# Altium PCB PCB1.PcbDoc (part 1 of 3)
Units mm, origin at the board's own origin, x right, y up, seen from the top; angles counter-clockwise.
Board outline 127.59 x 140.12 mm, 2 copper layers (Top Layer, Bottom Layer), stack 1.57 mm thick; 24 components, 13 nets, 167 pads, 3663 vias.
Unrouted connection lines stored in the file: 2.
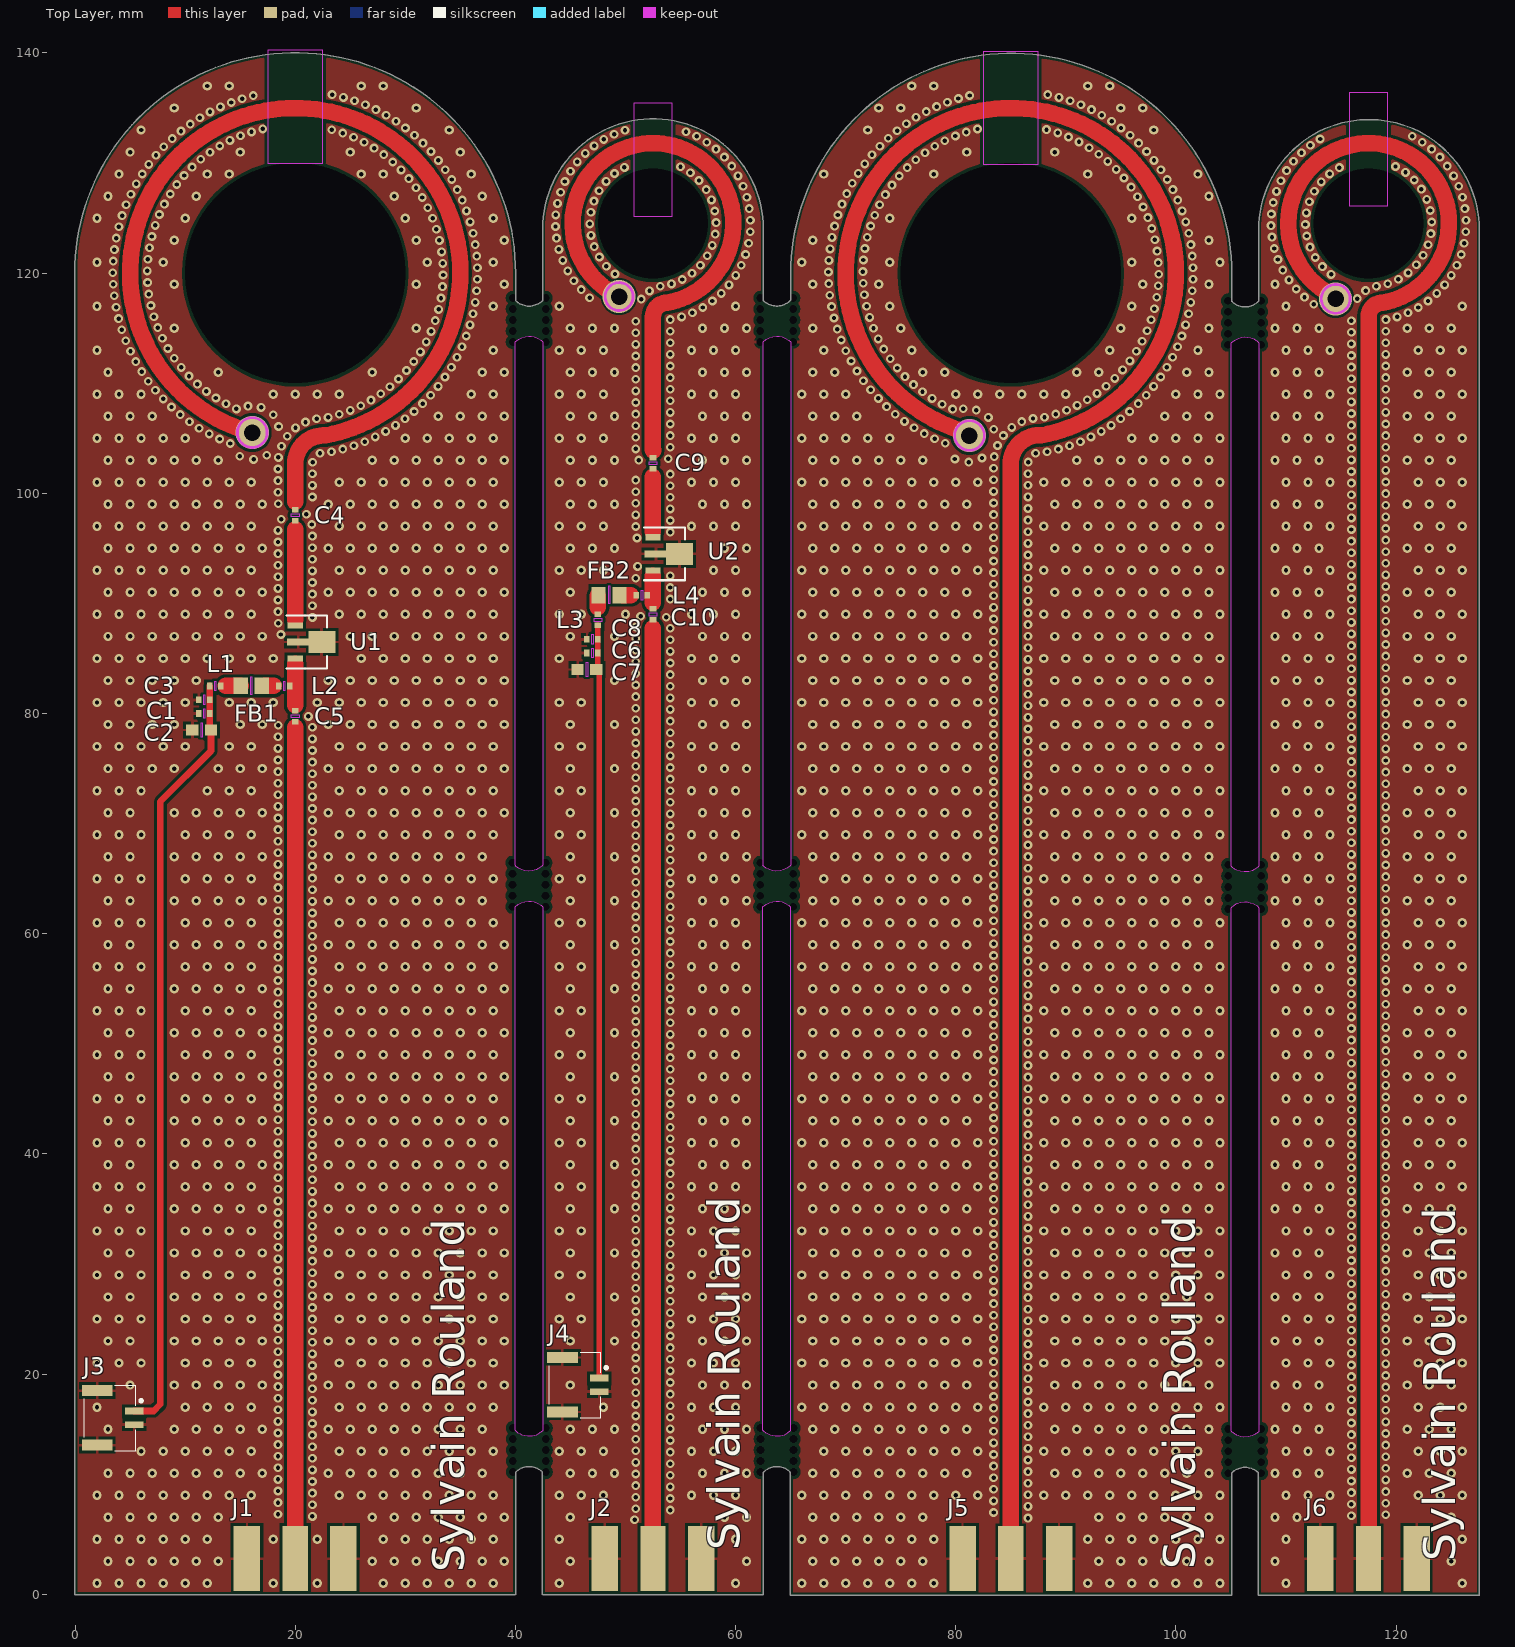
[diagram p0: Top Layer view]
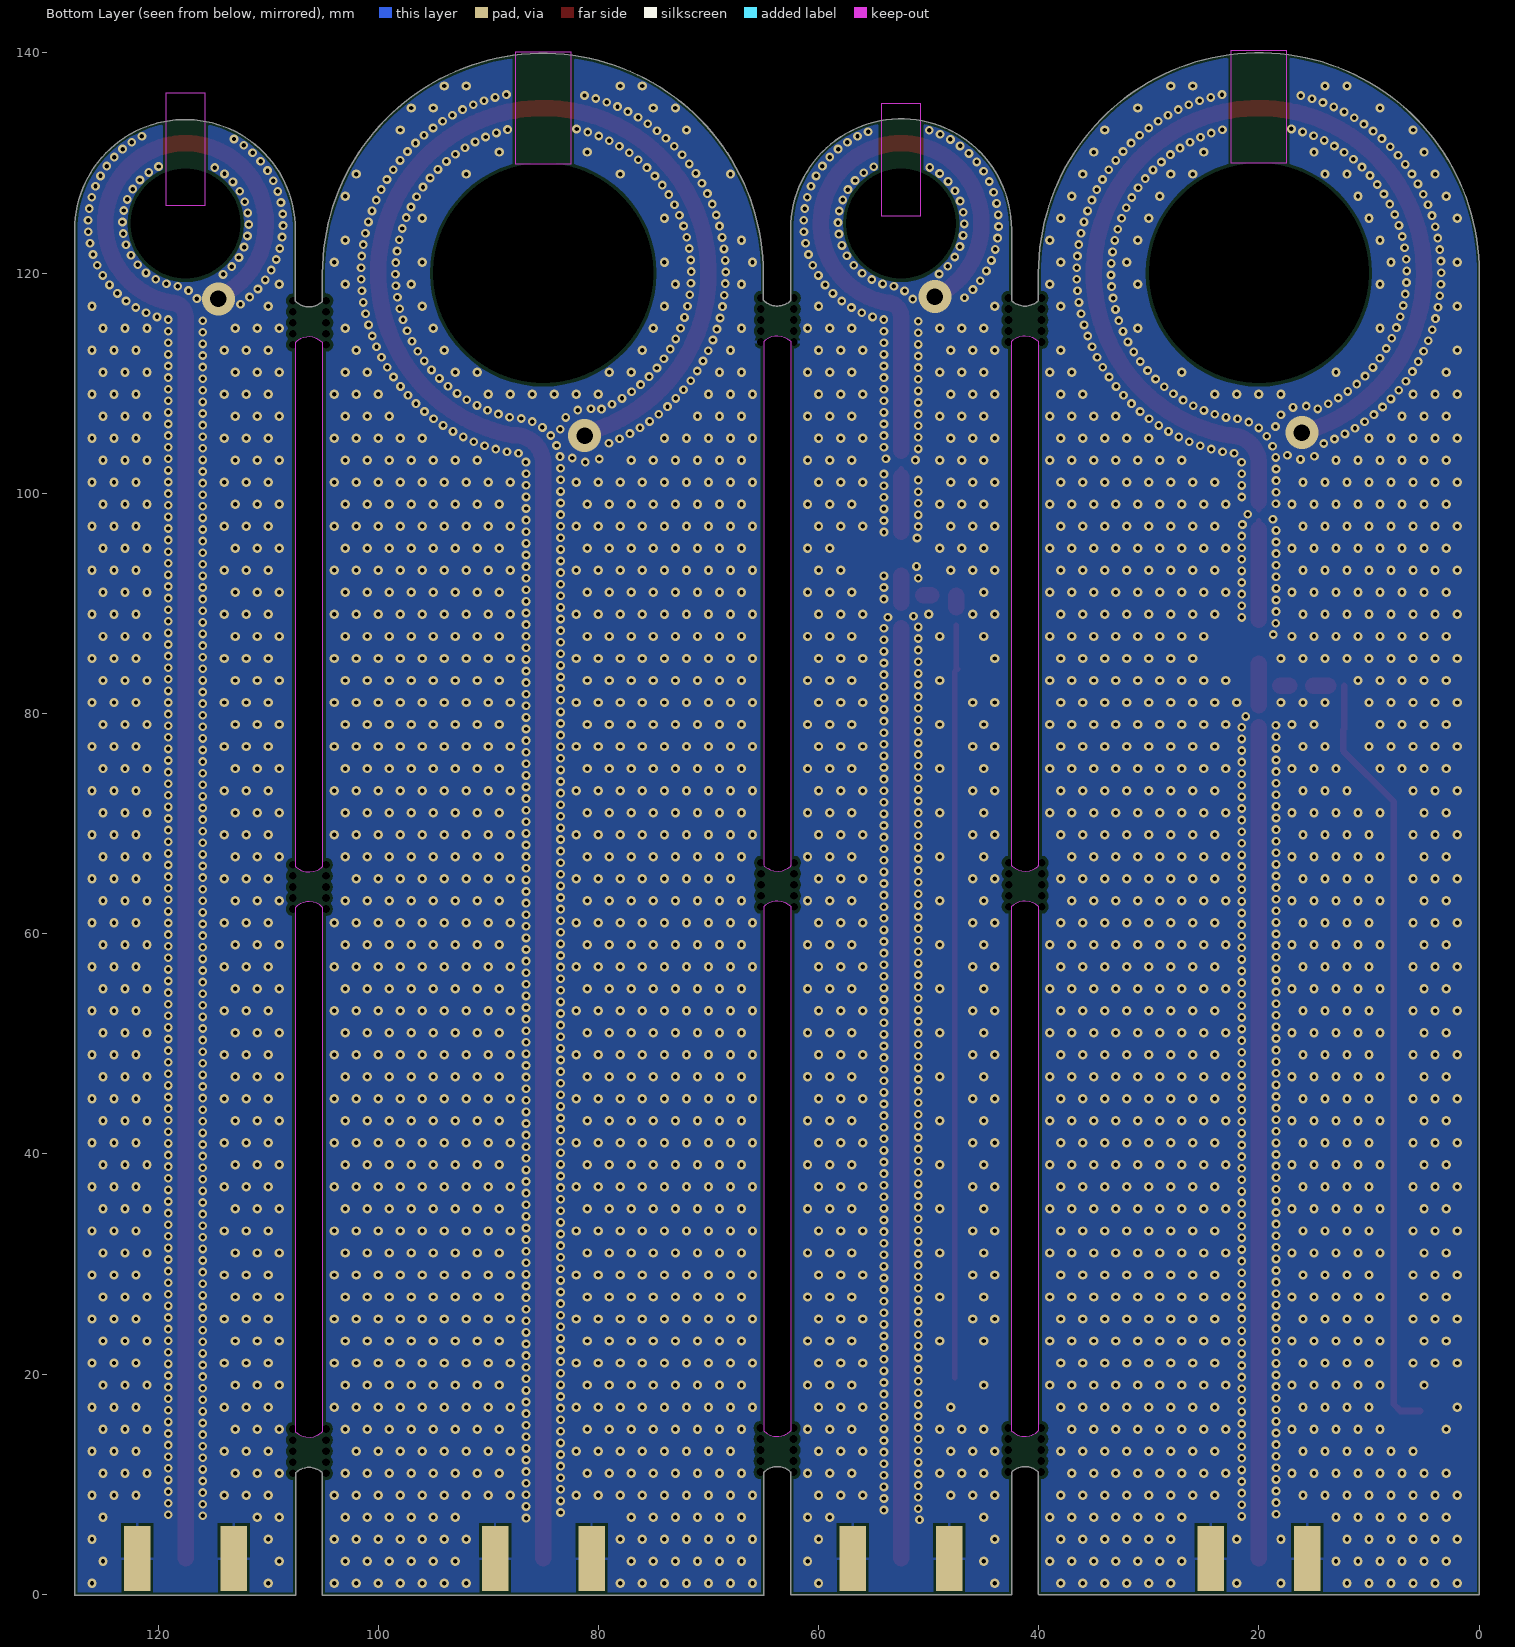
[diagram p1: Bottom Layer view, seen from below]
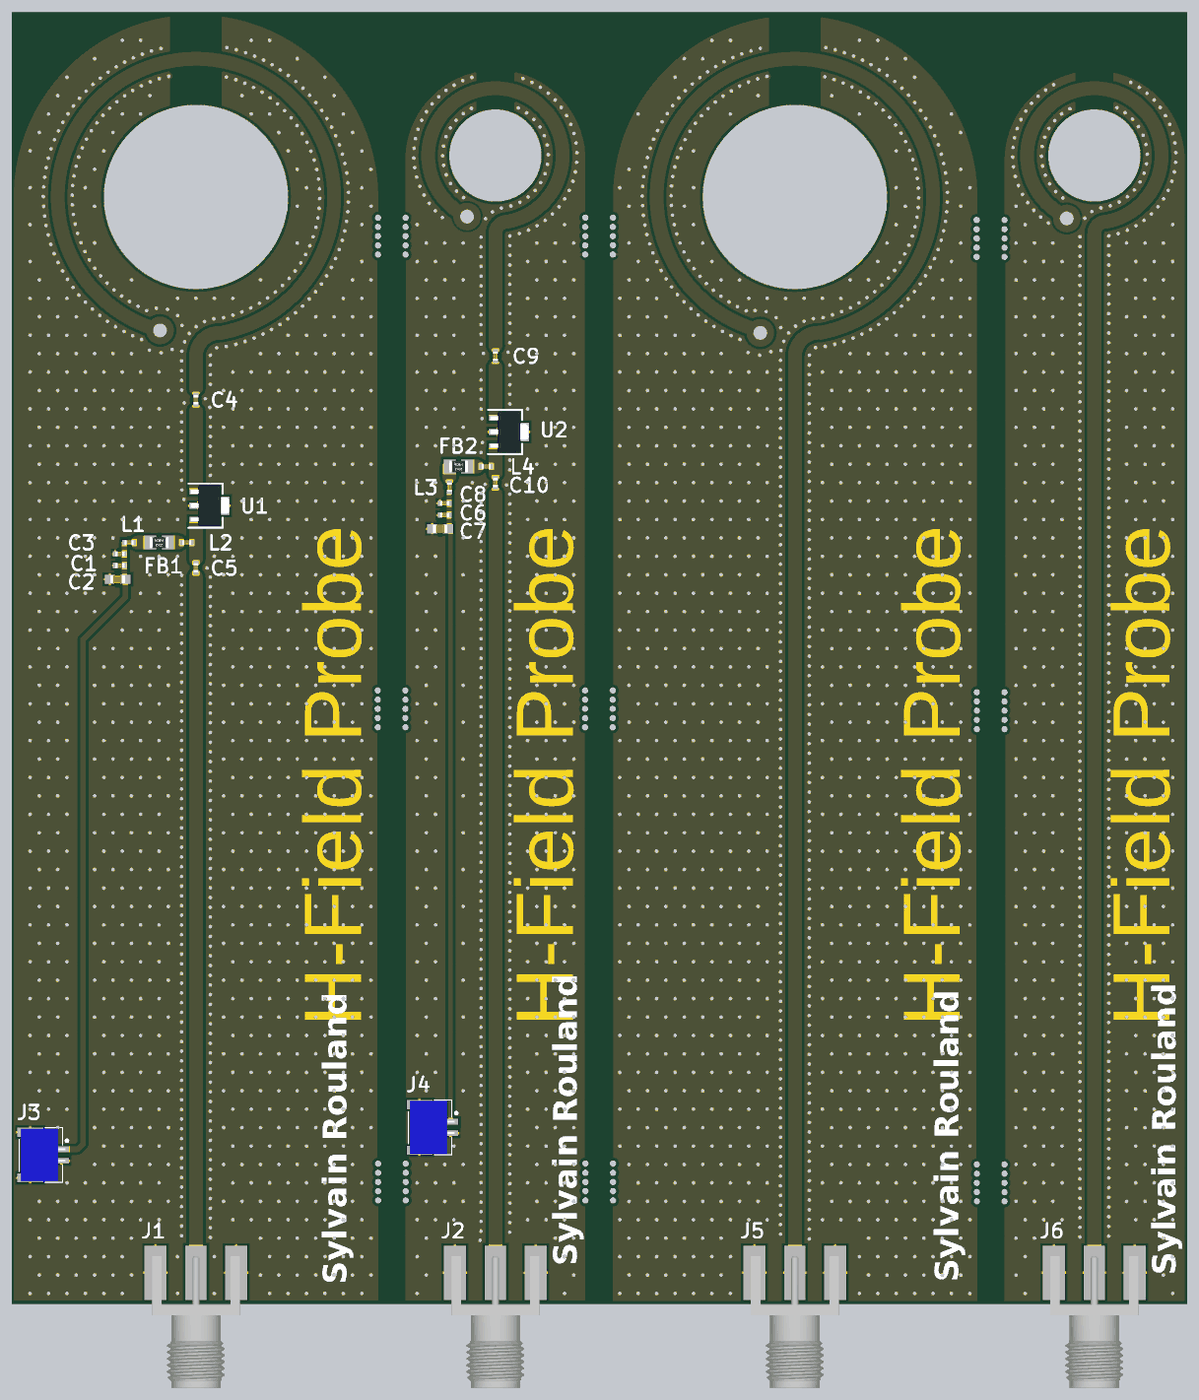
[diagram p4: 3D render of the assembled board from above, using the file's embedded part models]

## Layer stack, top to bottom
Top Solder: solder mask 0.01, Solder Resist, Dk 3.5
Top Layer: signal copper 0.035
Dielectric2: core 1.5, Core-009, Dk 4.5
Bottom Layer: signal copper 0.035
Bottom Solder: solder mask 0.01, Solder Resist, Dk 3.5

## Board outline
-0.025,0 ccw(c0,0) 0,-0.025 40,-0.025 ccw(c40,0) 40.025,0 40.025,11.085 cw(c41.25,9.846) 42.457,11.103 42.457,0 ccw(c42.482,0) 42.482,-0.025 62.5,-0.025 ccw(c62.5,0) 62.525,0 62.525,11.086 cw(c63.749,9.846) 64.974,11.085 64.975,-0.069 ccw(c65,-0.069) 64.975,-0.069 ccw(c65,-0.069) 65,-0.094 105.04,-0.094 ccw(c105.04,-0.069) 105.066,-0.069 105.066,11.016 cw(c106.29,9.777) 107.497,11.034 107.497,-0.069 ccw(c107.522,-0.069) 107.522,-0.094 127.54,-0.094 ccw(c127.54,-0.069) 127.566,-0.069 127.566,123.93 ccw(c127.54,123.93) 127.566,123.931 ccw(c127.54,123.931) 127.566,123.931 ccw(c117.54,123.931) 107.515,123.931 107.515,117.442 cw(c106.29,118.681) 105.066,117.442 105.066,119.931 ccw(c85.04,119.931) 65.015,119.931 65.013,117.551 cw(c63.749,118.75) 62.525,117.511 62.525,124 ccw(c62.5,124) 62.525,124 ccw(c52.5,124) 42.475,124 42.475,117.511 cw(c41.25,118.75) 40.025,117.511 40.025,120 ccw(c20,120) -0.025,120
cut-out: 105.04,113.681 105.34,113.92 105.603,114.063 105.924,114.164 106.266,114.2 106.504,114.185 106.777,114.131 107.076,114.021 107.384,113.824 107.54,113.681 107.54,66.126 107.452,66.055 107.178,65.854 106.923,65.732 106.595,65.635 106.21,65.605 105.857,65.655 105.546,65.762 105.34,65.871 105.128,66.027 105.022,66.126 105.04,66.144
cut-out: 105.026,62.378 105.325,62.617 105.588,62.761 105.909,62.861 106.251,62.898 106.489,62.882 106.762,62.829 107.061,62.718 107.369,62.521 107.526,62.378 107.526,14.823 107.523,14.767 107.229,14.544 106.946,14.392 106.591,14.289 106.16,14.274 105.874,14.314 105.681,14.381 105.532,14.46 105.325,14.569 105.113,14.724 105.025,14.823 105.026,14.841
cut-out: 62.499,113.75 62.799,113.99 63.062,114.133 63.383,114.234 63.725,114.27 63.963,114.255 64.236,114.201 64.535,114.091 64.843,113.893 64.999,113.75 64.999,66.196 64.911,66.125 64.637,65.923 64.382,65.802 64.055,65.705 63.669,65.675 63.316,65.725 63.006,65.832 62.799,65.941 62.587,66.097 62.481,66.196 62.499,66.214
cut-out: 62.484,62.439 62.783,62.679 63.046,62.822 63.368,62.923 63.71,62.959 63.948,62.943 64.221,62.89 64.519,62.779 64.827,62.582 64.984,62.439 64.984,14.885 64.981,14.828 64.688,14.606 64.405,14.453 64.049,14.351 63.618,14.335 63.332,14.376 63.139,14.442 62.99,14.521 62.783,14.63 62.571,14.786 62.483,14.885 62.484,14.903
cut-out: 39.985,62.439 40.284,62.678 40.547,62.822 40.868,62.922 41.21,62.959 41.448,62.943 41.721,62.89 42.02,62.779 42.328,62.582 42.485,62.439 42.485,14.884 42.482,14.828 42.188,14.605 41.906,14.453 41.55,14.35 41.119,14.335 40.833,14.375 40.64,14.442 40.491,14.52 40.284,14.63 40.072,14.785 39.984,14.884 39.985,14.902
cut-out: 40,113.75 40.299,113.989 40.562,114.133 40.884,114.234 41.226,114.27 41.464,114.254 41.737,114.201 42.035,114.09 42.343,113.893 42.5,113.75 42.5,66.195 42.412,66.125 42.137,65.923 41.883,65.801 41.555,65.705 41.17,65.674 40.816,65.725 40.506,65.832 40.299,65.941 40.087,66.096 39.982,66.195 40,66.213
cut-out: 39.982,62.445

## Design rules (kind name [scope] priority, off if disabled: settings)
BoardOutlineClearance [All] p1: gap=0.25 ignorepadtopadclearanceinfootprint=FALSE
Clearance [All] p1: gap=0.3 ignorepadtopadclearanceinfootprint=FALSE except(0.15: Track-Fill SMDPad-Fill; 0.2: THPad-Poly)
PolygonConnect [All] p1: thpad.connectstyle=Relief thpad.reliefconductorwidth=0.254 thpad.reliefentries=4 thpad.polygonreliefangle="90 Angle" thpad.airgapwidth=0.254 smdpad.connectstyle=Relief smdpad.reliefconductorwidth=0.254 smdpad.reliefentries=4 smdpad.polygonreliefangle="90 Angle" smdpad.airgapwidth=0.254 via.connectstyle=Direct via.reliefconductorwidth=0.254 via.reliefentries=4 via.polygonreliefangle="90 Angle" via.airgapwidth=0.254
RoutingVias [All] p1: holewidth=0.45 width=0.2 viastyle="Through Hole" minholewidth=0.1 minwidth=0.1 maxholewidth=5 maxwidth=10
SolderMaskExpansion [All] p1: expansion=0.102 istentingtop=FALSE
Width [All] p1: maxlimit=1.5 minlimit=0.1 preferedwidth=0.254
30 further rules are at their usual default settings.

## Components (designator, comment, footprint, x,y, rotation, side; value= is the part's Value field where it differs from the comment)
C1 "680pF" C0402[1005] 11.75,80 r0 top
C2 "1.2nF" C0603[1608] 11.5,78.5 r0 top
C3 "1uF" C0402[1005] 11.75,81.25 r0 top
C4 "47nF" C0402[1005] 20,98 r90 top
C5 "100nF" C0402[1005] 20,79.75 r90 top
C6 "680pF" C0402[1005] 47,85.5 r0 top
C7 "1.2nF" C0603[1608] 46.5,84 r0 top
C8 "1uF" C0402[1005] 47,86.75 r0 top
C9 "47nF" C0402[1005] 52.504,102.729 r90 top
C10 "100nF" C0402[1005] 52.5,89 r90 top
FB1 "1500R @ 100MHz" R0805[2012] 16,82.5 r180 top
FB2 "1500R @ 100MHz" R0805[2012] 48.5,90.75 r180 top
J1 "73251-1150" 732511040 20,3.25 r180 top locked
J2 "73251-1150" 732511040 52.5,3.25 r180 top locked
J3 "SM02B-GHS-TB(LF)(SN)" SM02B-GHS-TB 3.75,16 r90 top
J4 "SM02B-GHS-TB(LF)(SN)" SM02B-GHS-TB 46,19 r90 top
J5 "73251-1150" 732511040 85,3.25 r180 top
J6 "73251-1150" 732511040 117.5,3.25 r180 top
L1 "47nH" C0402[1005] 12.75,82.5 r180 top
L2 "47nH" C0402[1005] 19,82.5 r180 top
L3 "47nH" C0402[1005] 47.5,88.5 r270 top
L4 "47nH" C0402[1005] 51.5,90.75 r180 top
U1 "SKY65017-70LF" SOT-89 20,86.5 r270 top
U2 "SKY65017-70LF" SOT-89 52.5,94.5 r270 top

## Footprints (in the part's own frame and the unit in brackets; to place one, negate y for a bottom-side part, rotate by r counter-clockwise, add the part's x,y. Pads: shape width x height; smd on the part's side, far side on the other; paste and mask are expansions set on the pad)
732511040 [mm]
  rect 2.29x5.89 smd: 1(0,0)
  rect 2.41x5.89 smd: 2(-4.383,0) 2(4.383,0)
  rect 2.41x5.89 smd far side: 2(-4.383,0) 2(4.383,0)
  body extent -4.76,-1.77 4.76,12.5, height 4.36
C0402[1005] [mm] "Chip Capacitor, 2-Leads, Body 1.00x0.50mm, IPC High Density"
  rect 0.5x0.6 smd: 1(-0.5,0) 2(0.5,0)
  Top Layer keep-out region: -0.1,-0.4 0.1,-0.4 0.1,0.4 -0.1,0.4
  body extent -0.5,-0.25 0.5,0.25, height 0.6
C0603[1608] [mm] "Chip Capacitor, 2-Leads, Body 1.60x0.80mm, IPC High Density"
  rect 1.1x1 smd: 1(-0.85,0) 2(0.85,0)
  Top Layer keep-out region: -0.1,-0.6 0.1,-0.6 0.1,0.6 -0.1,0.6
  body extent -0.8,-0.45 0.8,0.45, height 0.8
R0805[2012] [mm]
  rect 1.3x1.5 smd: 1(-0.95,0) 2(0.95,0)
  Top Layer keep-out region: -0.1,-0.8 0.066,-0.8 0.066,0.728 -0.1,0.728
  body extent -1,-0.62 1,0.63, height 0.45
SM02B-GHS-TB [mm]
  rect 0.6x1.7 smd: 1(0.645,-1.623) 2(-0.605,-1.623)
  rect 1x2.8 smd: MP1(-2.455,1.727) MP2(2.495,1.727)
  silkscreen extent -2.95,-2.38 3,2.93, body extent -2.86,-2.07 2.89,2.78, height 4.25
SOT-89 [mm]
  rect 0.57x1.4 smd: 1(-1.5,0) 3(1.5,0)
  rect 2x2.45 smd: 2(0,2.425)
  rect 0.65x2 smd: 2(0,0.25)
  silkscreen extent -2.4,-0.8 2.4,2.9, body extent -2.25,-0.55 2.25,3.6, height 1.5

## Part data
C1 C6: library part "C680pF 50V 0402", "680pF 50V X7R 10% 0402", Manufacturer=Yageo, Manufacturer Part Number=CC0402KRX7R9BB681, Package=0402, Supplier Part Number1=311-1030-2-ND, Temp Coef=X7R, Tolerance=10%, Voltage=50V, Datasheet=http://www.yageo.com/documents/recent/UPY-GPHC_X7R_6.3V-to-50V_18.pdf, Internal Code=0-ECCAP680pX7RV50%10P0402-YG, Supplier1=DigiKey, Supplier Link1=https://www.digikey.fr/product-detail/fr/yageo/CC0402KRX7R9BB681/311-1030-2-ND/302764, Type=Capacitor
C2 C7: library part "C1.2nF 50V 0603", "1.2nF 50V C0G,NP0 5% 0603", Manufacturer=Walsin, Manufacturer Part Number=0603N122J500CT, Package=0603, Supplier Part Number1=1292-1482-6-ND, Temp Coef="C0G NP0", Tolerance=5%, Voltage=50V, Datasheet=http://www.passivecomponent.com/wp-content/uploads/2018/10/MLCC.pdf, Internal Code=0-ECCAP1n2NP0V50%05P0603-WS, Supplier1=DigiKey, Supplier Link1=https://www.digikey.fr/product-detail/fr/walsin-technology-corporation/0603N122J500CT/1292-1482-6-ND/9356021, Type=Capacitor
C3 C8: library part "C1uF 16V 0402", "1uF 16V X5R 10% 0402", Manufacturer="Samsung Electro-Mechanics", Manufacturer Part Number=CL05A105KO5NNNC, Package=0402, Supplier Part Number1=1276-1067-2-ND, Temp Coef=X5R, Tolerance=10%, Voltage=16V, Datasheet=http://www.samsungsem.com/kr/support/product-search/mlcc/CL05A105KO5NNNC.jsp, Internal Code=0-ECCAP1uX5RV16%10P0402-, Supplier1=DigiKey, Supplier Link1=https://www.digikey.fr/product-detail/fr/samsung-electro-mechanics/CL05A105KO5NNNC/1276-1067-2-ND/3886725, Type=Capacitor
C4 C9: library part "C47nF 50V 0402", "47nF 50V X7R 10% 0402", Manufacturer=Yageo, Manufacturer Part Number=CC0402KRX7R9BB473, Package=0402, Supplier Part Number1=311-3815-1-ND, Temp Coef=X7R, Tolerance=10%, Voltage=50V, Datasheet=http://www.yageo.com/documents/recent/UPY-GPHC_X7R_6.3V-to-50V_18.pdf, Internal Code=0-ECCAP47nX7RV50%10P0402-YG, Supplier1=DigiKey, Supplier Link1=https://www.digikey.fr/products/fr?keywords=311-3815-1-ND, Type=Capacitor
C5 C10: library part "C100nF 16V 0402", "100nF 16V X7R 10% 0402", Manufacturer=Kemet, Manufacturer Part Number=C0402C104K4RACTU, Package=0402, Supplier Part Number1=399-3521-1-ND, Temp Coef=X7R, Tolerance=10%, Voltage=16V, Datasheet=https://api.kemet.com/component-edge/download/datasheet/C0402C104K4RACTU.pdf, Internal Code=0-ECCAP100nX7RV16%10P0402-, RoHS Compliant=Yes, Supplier1=DigiKey, Supplier Link1=https://www.digikey.fr/products/fr?keywords=399-3521-1-ND, Type=Capacitor
FB1 FB2: library part "Ferrite bead 1.5 KOHM 0805 1LN", "1,5 kOhms @ 100MHz 1 Ligne de signal Ferrite Bead 0805 (2012 métrique) 1A 300mOhms", Manufacturer="Wurth Electronics Inc.", Manufacturer Part Number=742792097, Package=0805, Supplier Part Number1=732-4649-1-ND, Courant Nominal=1A, Datasheet=https://www.we-online.de/katalog/datasheet/742792097.pdf, Impedance="1500 Ohms @100MHz", Supplier1=Digikey, Supplier Link1=https://www.digikey.fr/product-detail/fr/w-rth-elektronik/742792097/732-4649-1-ND/4310380, Type=Ferrite
J1 J2 J5 J6: library part "SMA RA 50ohm", Frequency="max : 6GHz", Manufacturer=Molex, Supplier Part Number1=1909295, Temperature Range="-40°C to +90°C", Manufacturer Part Description=73251-1150, Manufacturer Part Number=73251-1150, RoHS=Yes, Supplier1=Farnell, Type=Connector
J3 J4: "Connector Header Surface Mount, Right Angle 2 position 0.049\" (1.25mm)", Manufacturer=JST, Supplier Part Number1=455-1564-2-ND, Datasheet=http://www.jst-mfg.com/product/pdf/eng/eGH.pdf, Manufacturer Part Number=SM02B-GHS-TB(LF)(SN), Supplier1=Digikey, Supplier Link1=https://www.digikey.com/product-detail/en/jst-sales-america-inc/SM02B-GHS-TB-LF-SN/455-1564-2-ND/807786, Type=Connector
L1 L2 L3 L4: library part "L47nH 210mA 1Ohm 0402", "47nH 210mA 5% 1Ohm", Current rating=210mA, DC Resistance="1.08Ohm max", Manufacturer="Murata Electronics North America", Manufacturer Part Number=LQW15AN47NJ00D, Package=0402, Package Metric=1x0.5x0.6mm, Supplier Part Number1=490-1154-2-ND, Tolerance=5%, Datasheet=https://search.murata.co.jp/Ceramy/image/img/P02/JELF243A-0050.pdf, Internal Code=00-ECL47nA210m%05P0402-, Supplier1=Digikey, Supplier Link1=https://www.digikey.fr/product-detail/en/murata-electronics-north-america/LQW15AN47NJ00D/490-1154-2-ND/584363, Type=Inductor
U1 U2: "Amplificateur RF .1-6.0GHz InGaP HBT Sm Sig Gain 20dB", Manufacturer=Skyworks, Supplier Part Number1=873-SKY65017-70LF, Datasheet=https://www.mouser.fr/datasheet/2/472/SKY65017_70LF_200528I-1524673.pdf, Manufacturer Part Number=SKY65017-70LF, Supplier1=Digikey, Supplier Link1=https://www.mouser.fr/ProductDetail/?qs=WMHGlxXAKT99sCQ%252BRQ%252BbPg%3D%3D

## Free pads (board coordinates)
  round 0 hole 0.7 unplated: 1(39.732,62.445) 1(39.732,63.445) 1(39.732,64.445) 1(39.732,65.445) 1(39.732,66.445) 1(39.75,113.75) 1(39.75,114.75) 1(39.75,115.75) 1(39.75,116.75) 1(39.75,117.75) 1(39.769,11.096) 1(39.769,12.096) 1(39.769,13.096) 1(39.769,14.096) 1(39.769,15.096) 1(42.732,62.445) 1(42.732,63.445) 1(42.732,64.445) 1(42.732,65.445) 1(42.732,66.445) 1(42.75,113.75) 1(42.75,114.75) 1(42.75,115.75) 1(42.75,116.75) 1(42.75,117.75) 1(42.769,11.096) 1(42.769,12.096) 1(42.769,13.096) 1(42.769,14.096) 1(42.769,15.096) 1(62.231,62.446) 1(62.231,63.446) 1(62.231,64.446) 1(62.231,65.446) 1(62.231,66.446) 1(62.249,114.75) 1(62.249,115.75) 1(62.249,116.75) 1(62.249,117.75) 1(62.25,113.75) 1(62.269,11.096) 1(62.269,12.096) 1(62.269,13.096) 1(62.269,14.096) 1(62.269,15.096) 1(65.231,62.446) 1(65.231,63.446) 1(65.231,64.446) 1(65.231,65.446) 1(65.231,66.446) 1(65.249,114.75) 1(65.249,115.75) 1(65.249,116.75) 1(65.249,117.75) 1(65.25,113.75) 1(65.269,11.096) 1(65.269,12.096) 1(65.269,13.096) 1(65.269,14.096) 1(65.269,15.096) 1(104.716,113.505) 1(104.716,114.505) 1(104.716,115.505) 1(104.716,116.505) 1(104.716,117.505) 1(104.75,11) 1(104.75,12) 1(104.75,13) 1(104.75,14) 1(104.75,15) 1(104.75,62.25) 1(104.75,63.25) 1(104.75,64.25) 1(104.75,65.25) 1(104.75,66.25) 1(104.75,113.5) 1(104.75,114.5) 1(104.75,115.5) 1(104.75,116.5) 1(104.75,117.5) 1(107.75,11) 1(107.75,12) 1(107.75,13) 1(107.75,14) 1(107.75,15) 1(107.75,62.25) 1(107.75,63.25) 1(107.75,64.25) 1(107.75,65.25) 1(107.75,66.25) 1(107.75,113.5) 1(107.75,114.5) 1(107.75,115.5) 1(107.75,116.5) 1(107.75,117.5)
  round 0 hole 20: 2(20,120) 2(85,120)
  round 0 hole 10: 3(52.5,124.5) 3(117.5,124.5)

## Via types
v1: diameter 0.85, hole 0.4, Top Layer to Bottom Layer, tented both sides, 2428 vias
v2: diameter 0.8, hole 0.4, Top Layer to Bottom Layer, tented both sides, 1231 vias
v3: diameter 3, hole 1.5, Top Layer to Bottom Layer, tented both sides, 4 vias